# Altium PCB ADS7946.PcbDoc
Units mil, origin at the board's own origin, x right, y up, seen from the top; angles counter-clockwise.
Board outline 1250 x 1000 mil, 4 copper layers (Top Layer, Power, GND, Bottom Layer), stack 23.756 mil thick; 26 components, 15 nets, 101 pads, 30 vias.
Unrouted connection lines stored in the file: 1.
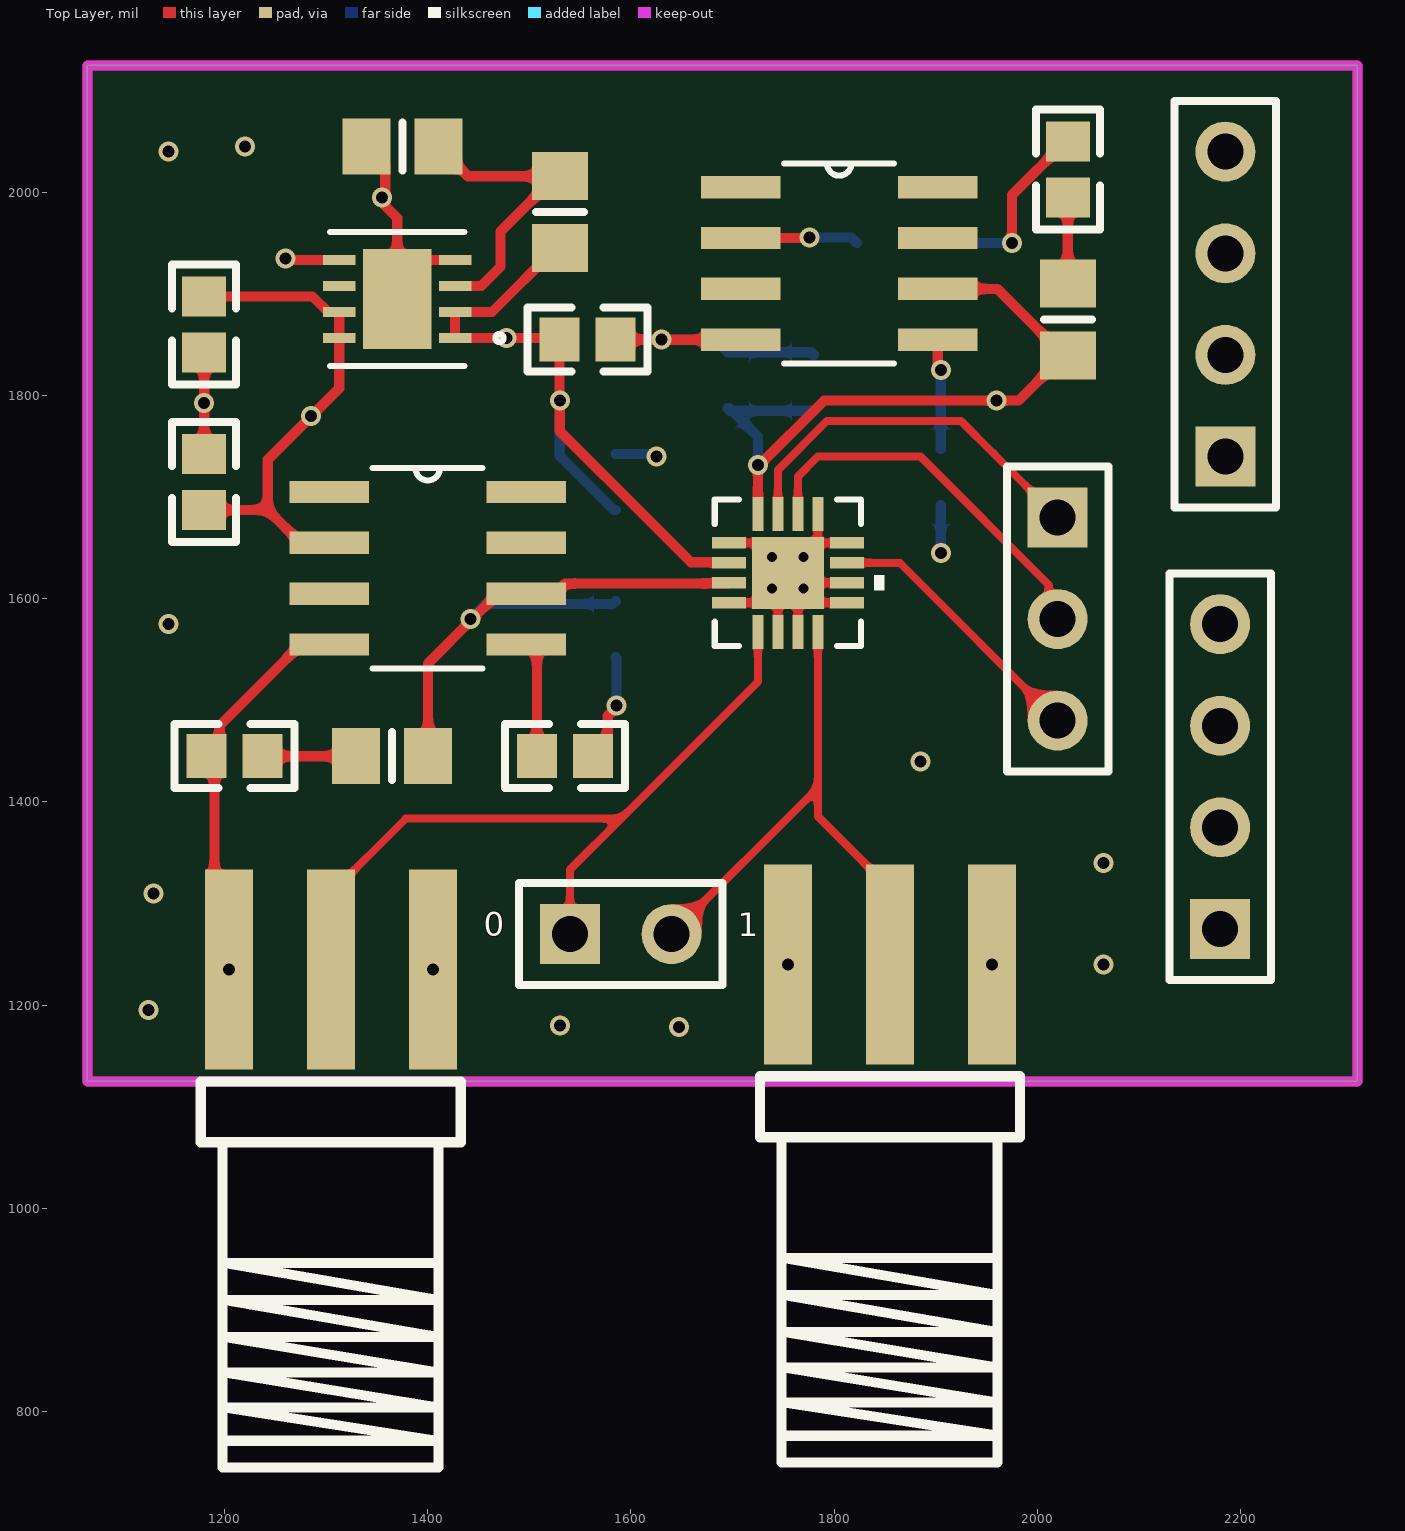
[diagram p0: Top Layer view]
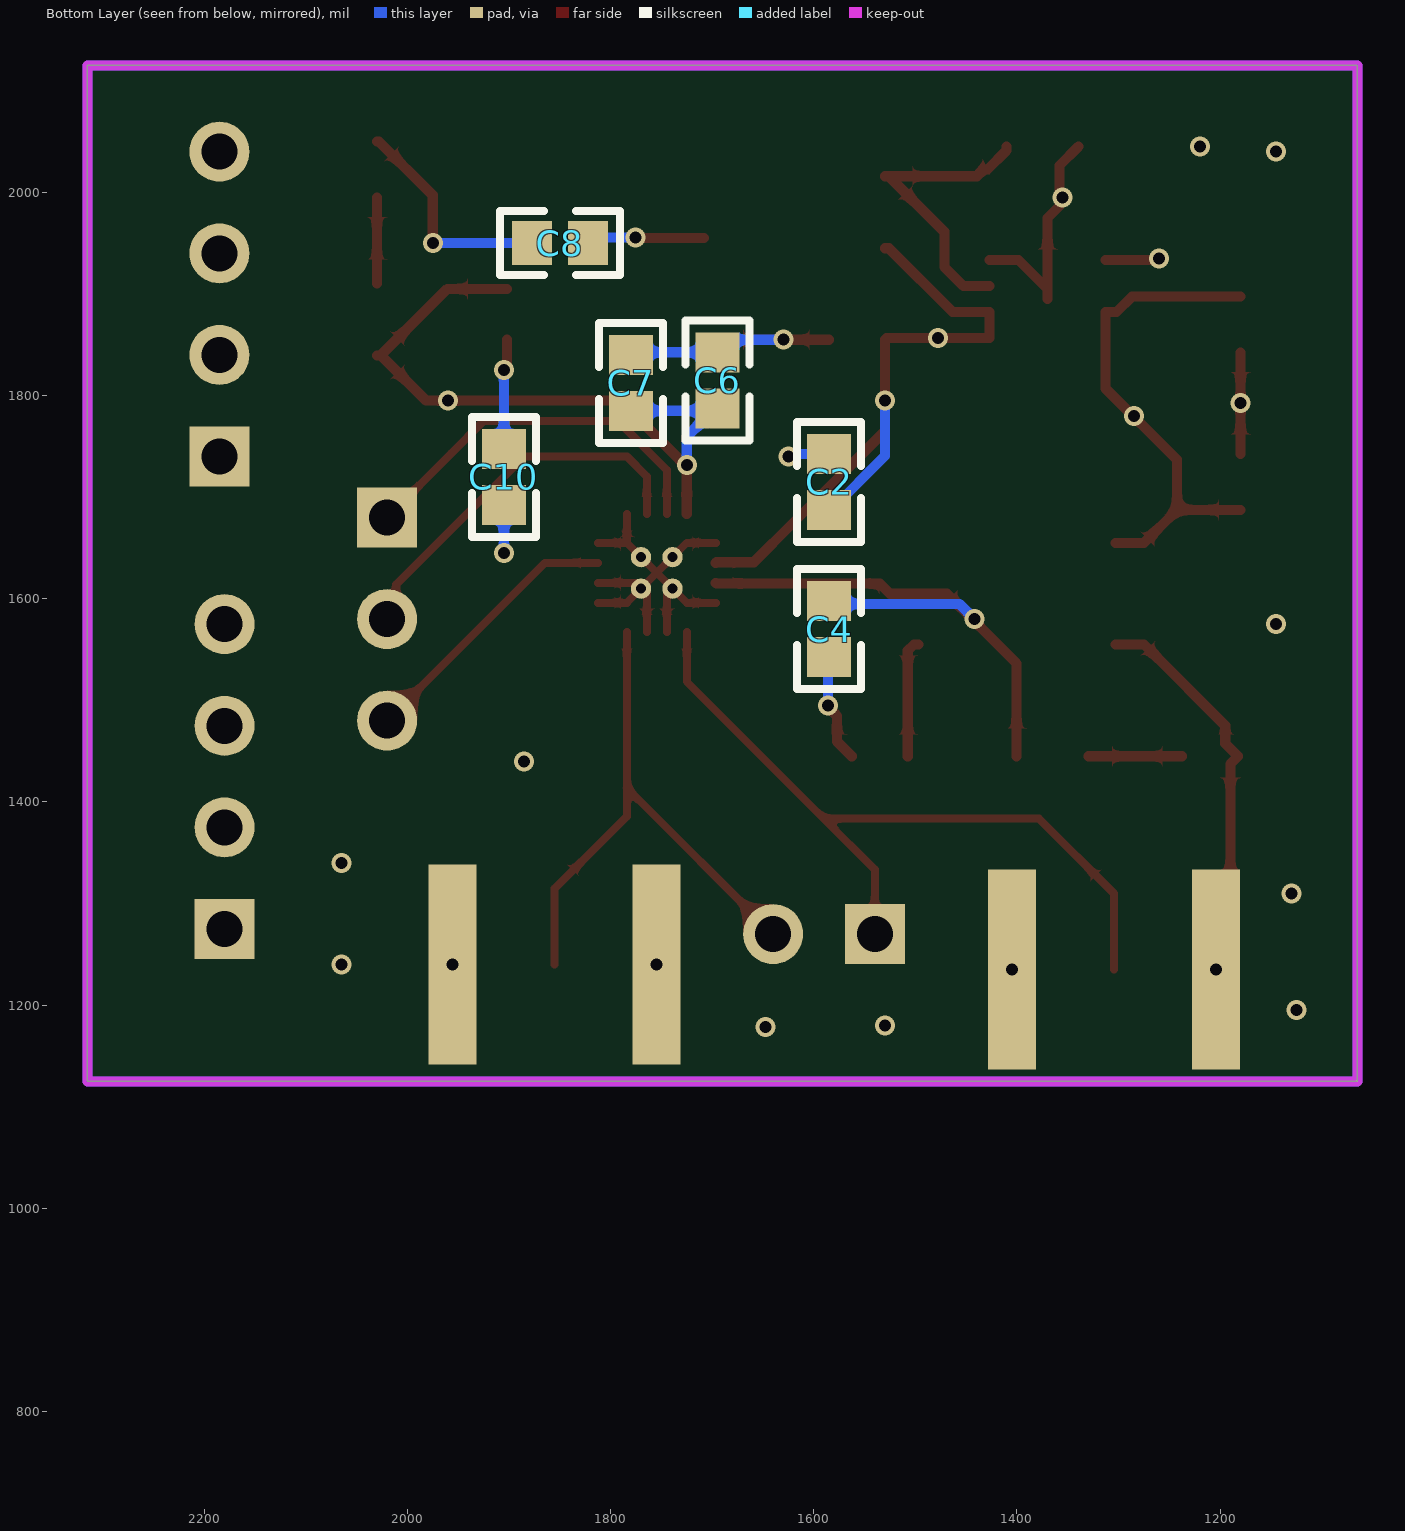
[diagram p1: Bottom Layer view, seen from below]
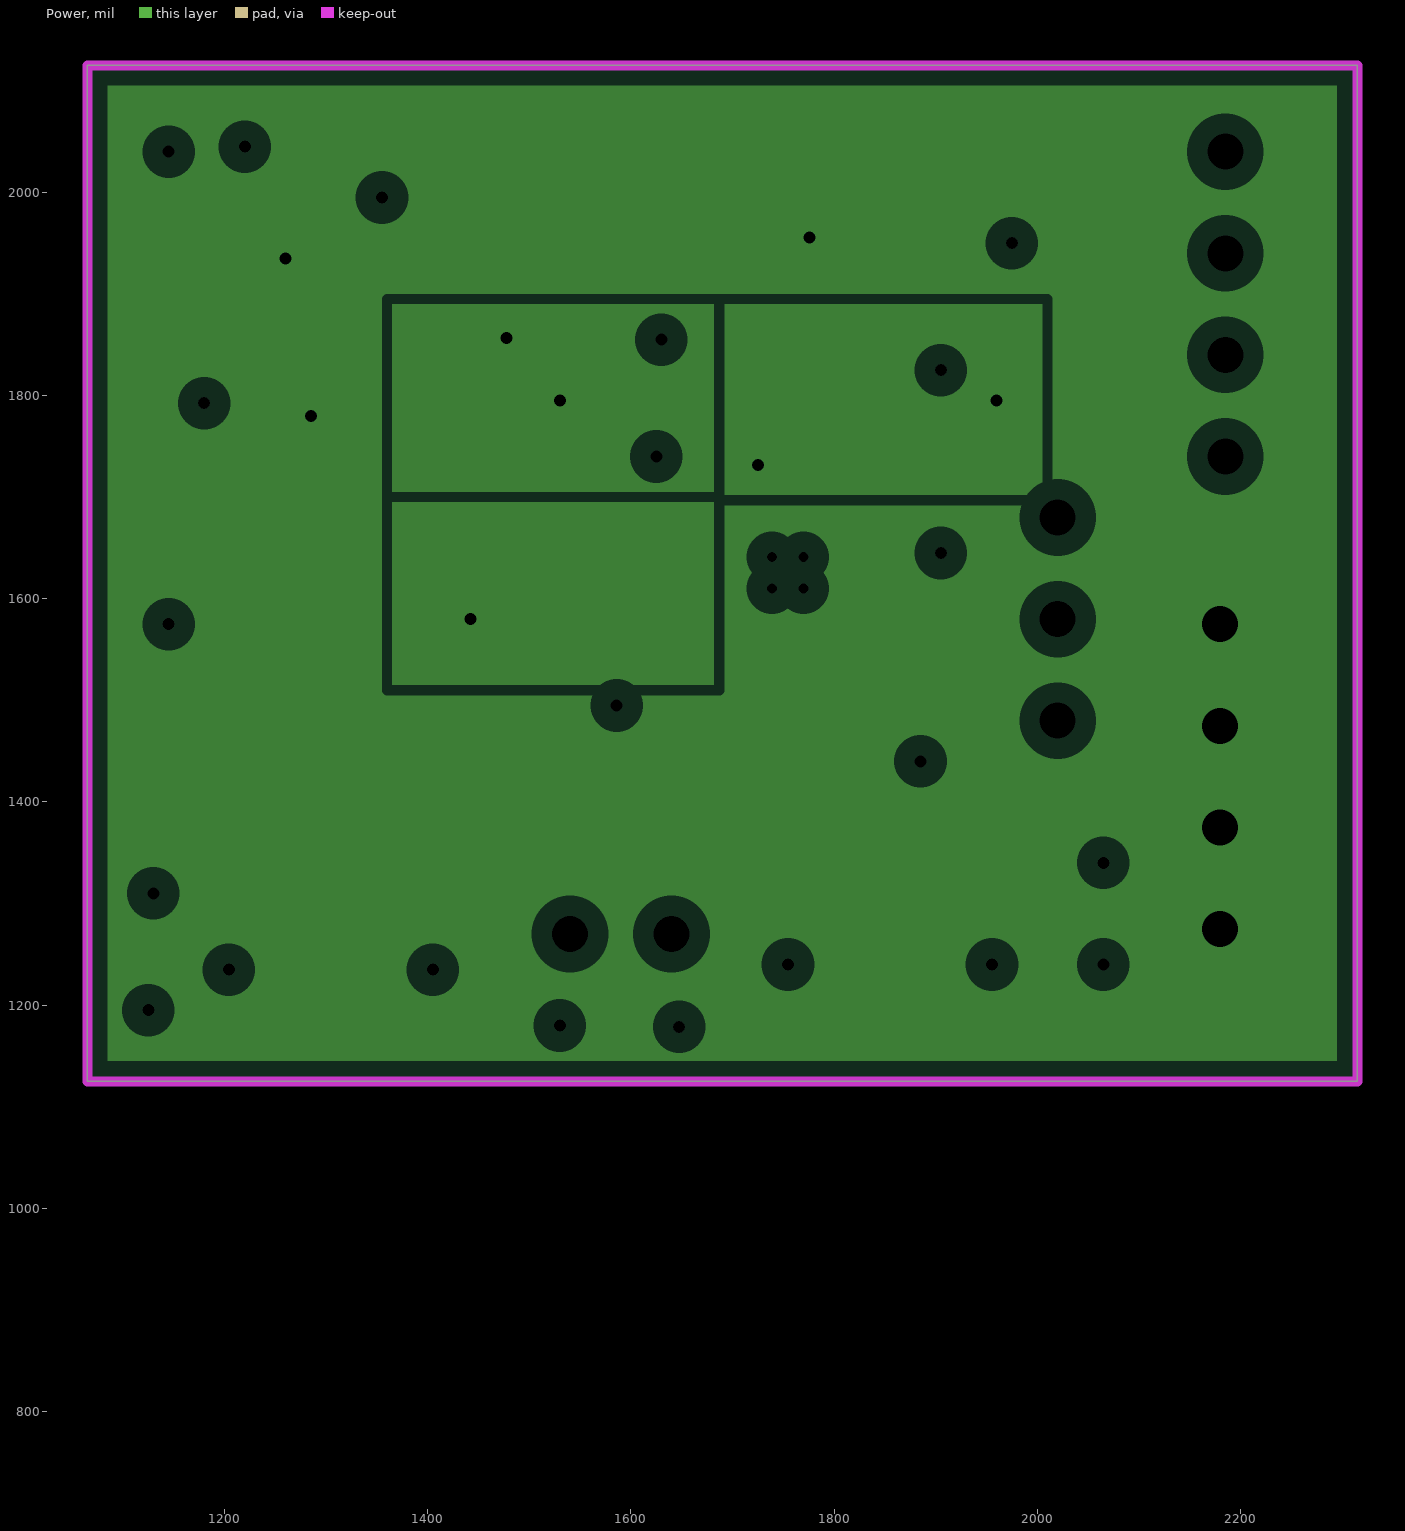
[diagram p2: Power, clearances drawn from the general rule]
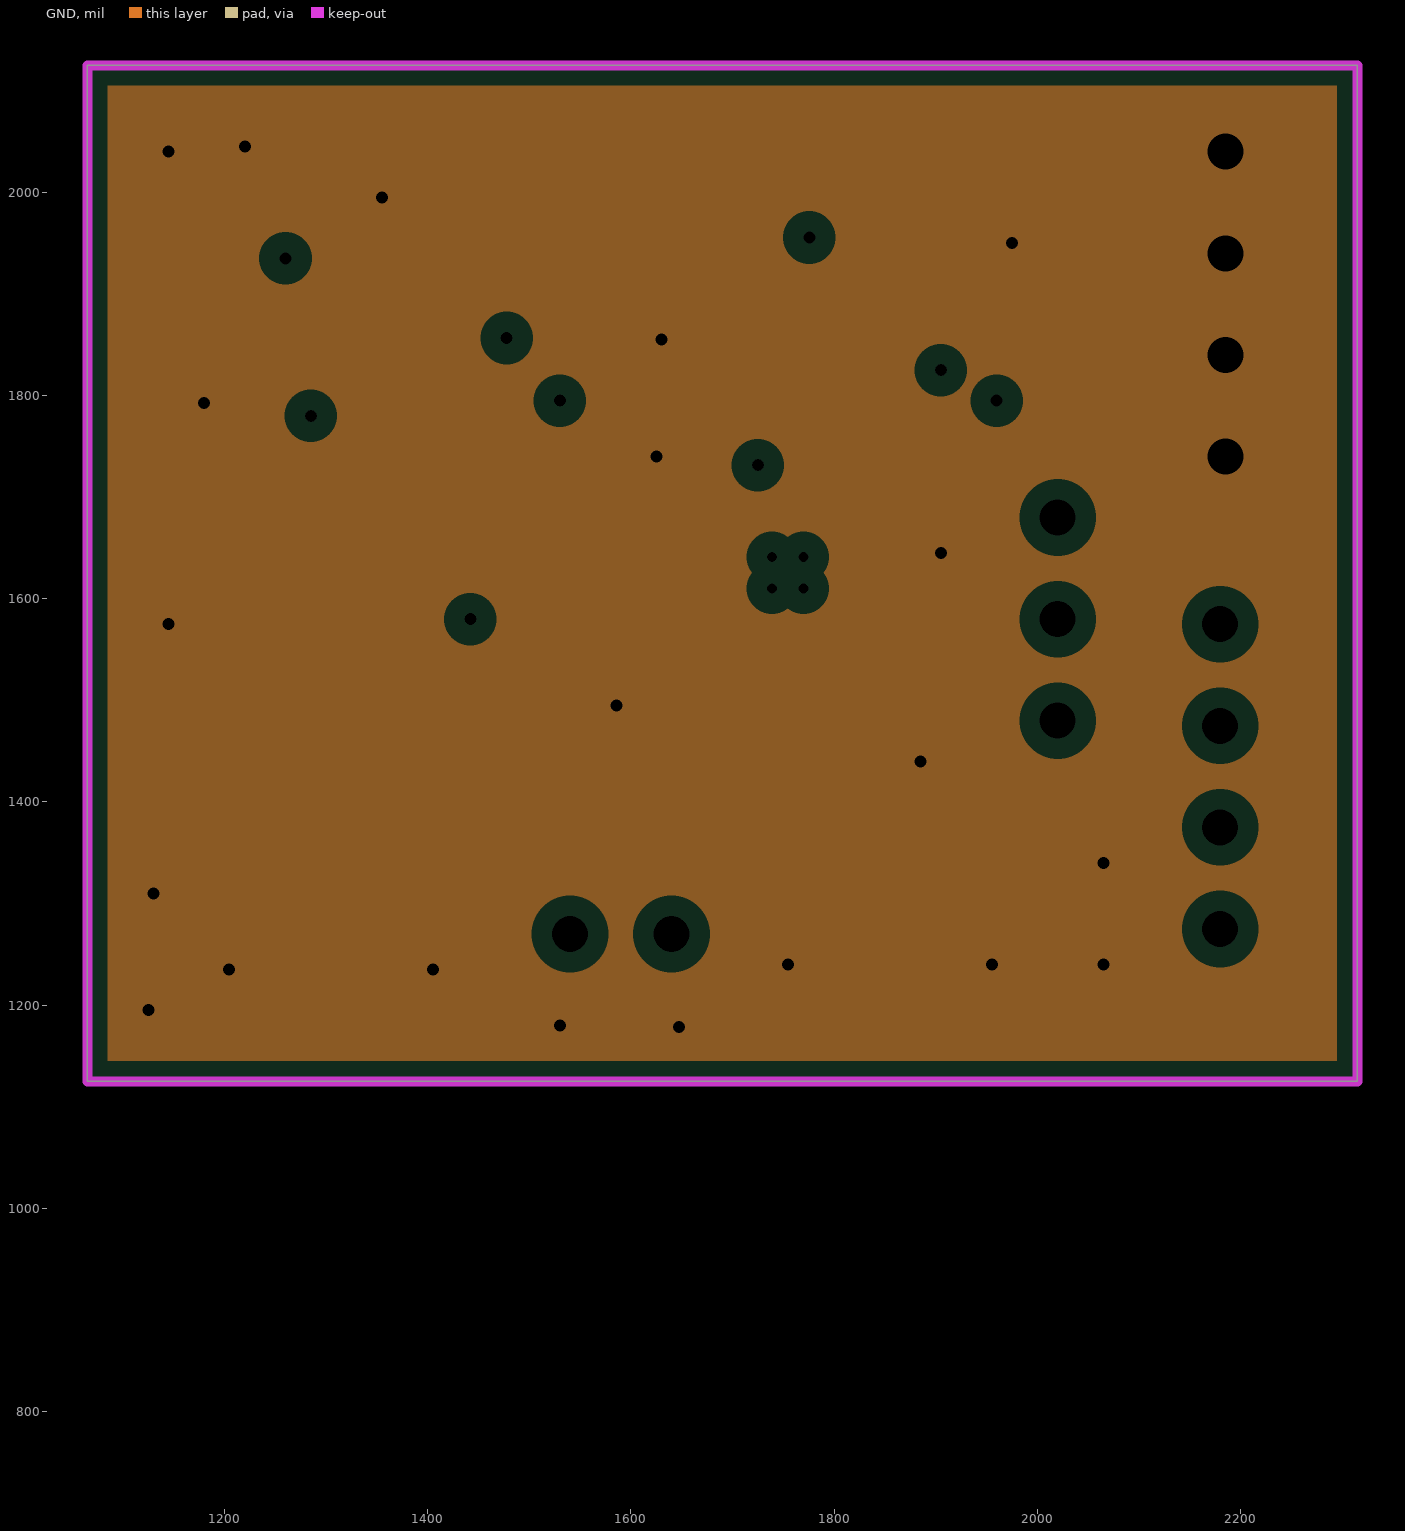
[diagram p3: GND, clearances drawn from the general rule]

## Layer stack, top to bottom
Top Solder: solder mask 0.4, Solder Resist, Dk 3.5
Top Layer: signal copper 1.4
Dielectric 2: prepreg 2.8, PP-006, Dk 4.1
Power: plane copper 1.378, net (Multiple Nets)
Dielectric 1: dielectric 12.6, FR-4, Dk 4.8
GND: plane copper 1.378, net GND
Dielectric 3: prepreg 2.8, PP-006, Dk 4.1
Bottom Layer: signal copper 1.4
Bottom Solder: solder mask 0.4, Solder Resist, Dk 3.5

## Board outline
1065,1125 2315,1125 2315,2125 1065,2125

## Design rules (kind name [scope] priority, off if disabled: settings)
Clearance [All] p1: gap=3.94 ignorepadtopadclearanceinfootprint=FALSE
PlaneClearance [All] p1: clearance=20
PlaneConnect [All] p1: planeconnectstyle=Relief reliefexpansion=20 reliefentries=4 reliefconductorwidth=10 reliefairgap=10
PolygonConnect [All] p1: connectstyle=Relief reliefconductorwidth=10 reliefentries=4 polygonreliefangle="90 Angle" airgapwidth=10
RoutingVias [All] p1: holewidth=28 width=50 viastyle="Through Hole" minholewidth=28 minwidth=50 maxholewidth=28 maxwidth=50
SolderMaskExpansion [All] p1: expansion=4 istentingtop=FALSE
Width [All] p1: maxlimit=19.68 minlimit=3.94 preferedwidth=10
28 further rules are at their usual default settings.

## Classes and differential pairs
component class ADS7946: C5 C9 C11

## Components (designator, comment, footprint, x,y, rotation, side; value= is the part's Value field where it differs from the comment)
C1 "" 0603 1180,1715 r270 top value=5u
C2 "" 0603 1585,1715 r270 bottom value=1u
C3 "" 0603 1535,1445 r0 top value=1u
C4 "" 0603 1585,1570 r90 bottom value=1u
C5 "" 0603 1210,1445 r180 top value=10u
C6 "" 0603 1695,1815.01 r270 bottom value=100n
C7 "" 0603 1780,1812.57 r270 bottom value=100n
C8 "" 0603 1850,1950 r180 bottom value=5u
C9 "" 0603 2030,2022.56 r90 top value=10u
C10 "" 0603 1905,1720 r270 bottom value=1u
C11 "" 0603 1557.44,1855 r180 top value=1u
C12 "" 0603 1180,1870 r90 top value=1u
P1 "" HDR1X2 1540,1270 r0 top
P2 "" HDR1X3 2020,1680 r270 top
P3 "" HDR1X4 2180,1275 r90 top
P4 "" HDR1X4 2185,1740 r90 top
R1 "" "RES 0805N (2012)" 1365,1445 r180 top value=1
R2 "" "RES 0805N (2012)" 2030,1875 r90 top value=1
R3 "" "RES 0805N (2012)" 1530,1980.43 r90 top value=1
R4 "" "RES 0805N (2012)" 1375,2045 r0 top value=1
SMA1 "" SMA-SMD_BWSMA-KE-P001 1854.99,1240 r270 top
SMA2 "" SMA-SMD_BWSMA-KE-P001 1304.6,1235 r270 top
U1 "" D8 1400,1630 r0 top
U2 "" RTE16_1P7X1P7 1754.5,1625.5 r0 top
U3 "" D8 1805,1930 r0 top
U4 "" QFN-8_MP20051_MNP 1370,1895 r180 top

## Footprints (in the part's own frame and the unit in brackets; to place one, negate y for a bottom-side part, rotate by r counter-clockwise, add the part's x,y. Pads: shape width x height; smd on the part's side, far side on the other; paste and mask are expansions set on the pad)
0603 [mm]
  rect 1x1.1 smd: 1(-0.7,0) 2(0.7,0)
  silkscreen extent -1.5,-0.8 1.5,0.8
D8 [mil]
  rect 78x22 smd: 1(-97,75) 2(-97,25) 3(-97,-25) 4(-97,-75) 5(97,-75) 6(97,-25) 7(97,25) 8(97,75)
  silkscreen extent -54,-98 54,98, body extent -122,-99 122,99, height 69
HDR1X2 [mm] "Connector; Header; 2 Position"
  rect 1.5x1.5 hole 0.9: 1(0,0)
  round 1.5 hole 0.9: 2(2.54,0)
  silkscreen extent -1.27,-1.27 3.81,1.27
HDR1X3 [mm] "Connector; Header; 3 Position"
  rect 1.5x1.5 hole 0.9: 1(0,0)
  round 1.5 hole 0.9: 2(2.54,0) 3(5.08,0)
  silkscreen extent -1.27,-1.27 6.35,1.27
HDR1X4 [mm] "Connector; Header; 4 Position"
  rect 1.5x1.5 hole 0.9: 1(0,0)
  round 1.5 hole 0.9: 2(2.54,0) 3(5.08,0) 4(7.62,0)
  silkscreen extent -1.27,-1.27 8.89,1.27
QFN-8_MP20051_MNP [mil]
  rect 32x10 smd paste+0 mask+0: 1(-57,38.39) 2(-57,12.8) 3(-57,-12.8) 4(-57,-38.39) 5(57,-38.39) 6(57,-12.8) 7(57,12.8) 8(57,38.39)
  rect 67x98 smd paste+0 mask+0: 9(0,0)
  silkscreen extent -105,-66 66,66, body extent -61,-61 61,61, height 37
"RES 0805N (2012)" [mm] "Chip Resistor, Body 2.0x1.2mm, IPC Medium Density"
  rect 1.2x1.4 smd: 1(-0.9,0) 2(0.9,0)
  silkscreen extent 0,-0.6 0,0.6, body extent -1,-0.62 1,0.63, height 0.55
RTE16_1P7X1P7 [mm]
  rect 0.85x0.28 smd paste-0.14: 1(-1.475,0.75) 2(-1.475,0.25) 3(-1.475,-0.25) 4(-1.475,-0.75) 9(1.475,-0.75) 10(1.475,-0.25) 11(1.475,0.25) 12(1.475,0.75)
  rect 0.28x0.85 smd paste-0.14: 5(-0.75,-1.475) 6(-0.25,-1.475) 7(0.25,-1.475) 8(0.75,-1.475) 13(0.75,1.475) 14(0.25,1.475) 15(-0.25,1.475) 16(-0.75,1.475)
  rect 1.803x1.803 smd paste-0.889 mask-0.889: 17(0,0)
  round 0.508 hole 0.254: ""(-0.394,-0.394) ""(-0.394,0.394) ""(0.394,-0.394) ""(0.394,0.394)
  silkscreen extent -1.83,-1.83 2.41,1.83, body extent -1.63,-1.63 1.63,1.63, height 0.74
SMA-SMD_BWSMA-KE-P001 [mm]
  rect 5x1.2 smd: 1(0,0) 2(0,2.55) 5(0,-2.55)
  rect 5x1.2 smd far side: 3(0,2.55) 4(0,-2.55)
  silkscreen extent 2.79,-3.25 12.45,3.25

## Part data
C1 C2 C3 C4 C5 C6 C7 C8 C9 C10 C11 C12: library part Cap, "Capacitor", LatestRevisionDate=17-Jul-2002, LatestRevisionNote="Re-released for DXP Platform.", PackageReference=RAD-0.3, Published=8-Jun-2000, Publisher="Altium Limited"
P1: library part "Header 2", "Header, 2-Pin", LatestRevisionDate=17-Jul-2002, LatestRevisionNote="Re-released for DXP Platform.", Publisher="Altium Limited"
P2: library part "Header 3", "Header, 3-Pin", LatestRevisionDate=17-Jul-2002, LatestRevisionNote="Re-released for DXP Platform.", Publisher="Altium Limited"
P3 P4: library part "Header 4", "Header, 4-Pin", LatestRevisionDate=17-Jul-2002, LatestRevisionNote="Re-released for DXP Platform.", Publisher="Altium Limited"
R1 R2 R3 R4: library part Res1, "Resistor", LatestRevisionDate=17-Jul-2002, LatestRevisionNote="Re-released for DXP Platform.", PackageReference=AXIAL-0.3, Published=8-Jun-2000, Publisher="Altium Limited"
SMA1 SMA2: library part SMA
U1: library part REF5030AID, "No Description Available", Mfr_Name="Texas Instruments", Copyright="Copyright (C) 2022 Ultra Librarian. All rights reserved.", Manufacturer_Part_Number=REF5030AID, RefDes=RefDes, Type=DEV
U2: library part ADS7946SRTER, "No Description Available", Mfr_Name="Texas Instruments", Copyright="Copyright (C) 2022 Ultra Librarian. All rights reserved.", Manufacturer_Part_Number=ADS7946SRTER, RefDes=RefDes, Type=DEV
U3: library part REF5040AID, "No Description Available", Mfr_Name="Texas Instruments", Copyright="Copyright (C) 2022 Ultra Librarian. All rights reserved.", Manufacturer_Part_Number=REF5040AID, RefDes=RefDes, Type=DEV
U4: library part MP20051DQ-LF-Z, "No Description Available", Mfr_Name="Monolithic Power Systems", Copyright="Copyright (C) 2022 Ultra Librarian. All rights reserved.", Manufacturer_Part_Number=MP20051DQ-LF-Z, RefDes=RefDes, Type=DEV

## Via types
v1: diameter 19.68, hole 11.81, Top Layer to Bottom Layer, tented both sides, 29 vias
v2: diameter 19.68, hole 11.81, Top Layer to Bottom Layer, 1 vias

## Nets (pads, with @x,y where several pads share a name; then routed paths per layer and width w, separated by ;. In a path a pad name is that pad's centre, name@x,y a point inside that pad or via, vN(x,y) a via of type N, cw(c..) or ccw(c..) an arc to the next point about the centre after c; other vN are vias at no path point)
3V: C4.2 R1.1 U1.6 U2.3 | length 572.8
  Top Layer w10: R1.1 1400.43,1536.43 v2@1444,1580 ; v2(1441.88,1580) v2@1444,1580 ; U2.3 1695.92,1615.15 1680.74,1615.15 1680.6,1615 1535,1615 1525,1605 U1.6 1469,1605 v2@1444,1580
  Bottom Layer w10: v2(1441.88,1580) 1456.88,1595 1582.43,1595 C4.2
4V: C6.2 C7.2 R2.1 U2.16 U3.6 | length 705.1
  Top Layer w10: U2.16 v1@1724.96,1729.96 ; v1(1724.96,1731.53) v1@1724.96,1729.96 ; U3.6 1960.63,1905 R2.1@2026.06,1839.57 ; R2.1 R2.1@2026.06,1839.57 ; v1@1724.96,1729.96 1790,1795 v1(1960,1795) 1981.5,1795 R2.1@2026.06,1839.57
  Bottom Layer w10: v1(1724.96,1731.53) 1724.96,1759.45 1696.97,1787.44 C6.2 1697.44,1785 C7.2
5V: C2.2 C11.2 R3.1 U2.2 U4.1 U4.2 | length 854.8
  Top Layer w10: C11.2@1528.27,1856.61 v1(1477.63,1856.61) U4.1 U4.2 1463.27,1882.2 1526.06,1945 R3.1 ; C11.2 1529.88,1765.12 1620,1675 ; v1(1530,1795) 1530,1765 1620,1675 ; U2.2 1695.92,1635.85 1659.15,1635.85 1620,1675
  Bottom Layer w10: v1(1530,1795) 1530,1740.47 1583.03,1687.43 C2.2
+5: C1.2 C8.2 C12.2 P3.1 P3.2 P3.3 P3.4 U1.2 U3.2 U4.5 U4.7 U4.8 | length 670.4
  Top Layer w10: C1.2 1242.57,1687.43 ; C12.2 1286.64,1897.57 1302,1882.2 U4.7 U4.8 1313,1807.24 1242.57,1736.81 1242.57,1687.43 ; v1(1260,1935) 1261.61,1933.39 U4.5 ; U1.2 1275,1655 1242.57,1687.43 ; U3.2 1775,1955 v1(1775.62,1955.62)
  Bottom Layer w10: v1(1775.62,1955.62) 1816.81,1955.62 C8.2
  other v1: 1285,1780
GND: C1.1 C2.1 C3.2 C4.1 C5.2 C6.1 C7.1 C8.1 C9.2 C10.2 C11.1 C12.1 P4.1 P4.2 P4.3 P4.4 R4.1 SMA1.2 SMA1.3 SMA1.4 SMA1.5 SMA2.2 SMA2.3 SMA2.4 SMA2.5 U1.4 U2.1 U2.4 U2.6 U2.7 U2.9 U2.10 U2.12 U2.13 U2.17 U3.4 U4.4 U4.9 | length 1883.4
  Top Layer w7.87: U2.4 1724.97,1595.97 1739,1610 U2.17@1744.65,1615.65 ; U2.1 1724.97,1655.03 1739,1641 U2.17 ; U2.6 U2.17@1744.65,1615.65 ; U2.17@1744.65,1610 U2.17@1744.65,1615.65 ; U2.7 U2.17@1764.35,1615.65 ; U2.17@1764.35,1610 U2.17@1764.35,1615.65 ; U2.17@1770,1615.66 U2.10 ; U2.13 U2.17@1784.04,1655.04 ; U2.9 1784.03,1595.97 1770,1610 U2.17@1764.35,1615.65 ; U2.12 U2.17@1784.04,1655.03 ; U2.17@1744.65,1615.65 U2.17 ; U2.17 U2.17@1764.35,1615.65 ; U2.17 1770,1641 U2.17@1784.04,1655.04
  Top Layer w10: C1.1 C12.1 ; v1(1204.21,1235) 1190,1249.21 1190,1437.43 C5.2 1194.99,1457.56 1194.99,1474.99 1269,1549 1275,1555 U1.4 ; R4.1 1358.19,2026.38 1358.19,1995 1358.19,1986.63 1370,1974.82 U4.9@1370,1904.89 ; U4.9 U4.9@1370,1904.89 ; U4.4 1398.5,1933.39 U4.9@1370,1904.89 ; C3.2 1577.25,1459.68 1577.25,1484.73 1585.96,1493.44 v1(1585.96,1495) ; C11.1 v1(1630,1855) U3.4 ; v1(1975,1950) 1975,1997.09 2028.03,2050.12 C9.2
  Bottom Layer w10: C4.1 1585.96,1541.48 v1(1585.96,1495) ; C2.1 1622.44,1742.56 v1(1625,1740) ; v1(1630,1855) 1682.57,1855 C6.1 1777.56,1842.57 C7.1 ; C8.1 v1(1975,1950) ; v1(1905,1645) C10.2
  other v1: 1647.56,1178.73 1530,1180 1125,1195 1405,1235 1754.61,1240 1955.39,1240 2065,1240 1130,1310 2065,1340 1885,1440 1145,1575 1180,1792.5 1355,1995 1145,2040 1220,2045
Net_1: P2.1 U2.15 | length 377.9
  Top Layer w7.87: U2.15 1744.65,1726.83 1792.82,1775 1925,1775 1957.2,1742.8 P2.1
Net_1: P1.2 SMA1.1 U2.8 | length 560.5
  Top Layer w7.87: P1.2 1784.04,1414.04 ; U2.8 1784.04,1414.04 ; SMA1.1 1855,1314.8 1784.04,1385.77 1784.04,1414.04
Net_1: P1.1 SMA2.1 U2.5 | length 764.9
  Top Layer w7.87: SMA2.1 1304.61,1309.8 1378.34,1383.54 1590.12,1383.54 ; P1.1 1540,1333.42 1590.12,1383.54 ; U2.5 1724.96,1518.38 1590.12,1383.54
Net_1: C10.1 U3.5 | length 108.7
  Top Layer w10: U3.5 1902,1829.56 1905,1826.56 v1(1905,1825)
  Bottom Layer w10: C10.1 v1(1905,1825)
Net_1: C9.1 R2.2 | length 84.6
  Top Layer w10: R2.2 C9.1
Net_1: C5.1 R1.2 | length 92
  Top Layer w10: C5.1 R1.2
Net_1: C3.1 U1.5 | length 116.9
  Top Layer w10: U1.5 1501.44,1555 1507.44,1549 C3.1
Net_2: R3.2 R4.2 U4.3 | length 298.2
  Top Layer w10: R4.2 1410.43,2041.06 1429.06,2022.44 1432.99,2022.44 1439.57,2015.87 R3.2@1526.06,2015.87 ; U4.3 1452.8,1907.8 1471.48,1926.48 1471.48,1961.29 R3.2@1526.06,2015.87 ; R3.2 R3.2@1526.06,2015.87
Net_2: P2.2 U2.14 | length 381.5
  Top Layer w7.87: U2.14 1764.35,1720.39 1783.96,1740 1885,1740 2011.14,1613.86 2011.14,1588.86 P2.2
Net_3: P2.3 U2.11 | length 271.8
  Top Layer w7.87: U2.11 1864.66,1635.34 P2.3
pads on no net: U1.1 U1.3 U1.7 U1.8 U2. U3.1 U3.3 U3.7 U3.8 U4.6

## Polygon pours and split planes (outlines as drawn)
no net on Bottom Layer "NONET_L-01_P-001" (solid, pour order 0): 1065,2125
+5 on Power (split plane): 2294.9,1145.1 1085.1,1145.1 1085.1,2104.9 2294.9,2104.9
5V on Power (split plane): 1681.85,1820 1681.85,1705.1 1365.1,1705.1 1365.1,1889.9 1681.85,1889.9
3V on Power (split plane): 1681.85,1644.48 1681.85,1615 1681.85,1515.1 1365.1,1515.1 1365.1,1694.9 1681.85,1694.9
4V on Power (split plane): 2004.9,1702.05 1692.05,1702.05 1692.05,1889.9 2004.9,1889.9
GND on GND (split plane): 2294.9,1145.1 1085.1,1145.1 1085.1,2104.9 2294.9,2104.9

## Keep-outs
Keep-Out Layer:
  the board outline again, w10

## Other copper
Power (plane layer: these items are gaps in the copper):
  lines w10: 1360,1735 1360,1510 1563.51,1510 1635,1510 1686.95,1510 1686.95,1615 1686.95,1644.48 1686.95,1895 ; 1686.95,1700 1360,1700 1360,1895 1686.95,1895 ; 1686.95,1820 1686.95,1895 ; 1690,1696.95 2010,1696.95 2010,1895 1686.95,1895
Multi-Layer:
  the board outline again, w10

## Silkscreen, mask and mechanical layers (free items; w line width, h text height)
Top Overlay:
  text "0" at 1455,1260.48 h40
  text "1" at 1705,1260 h40